# EAGLE board jsbx 11 controls (EAGLE 6.2)
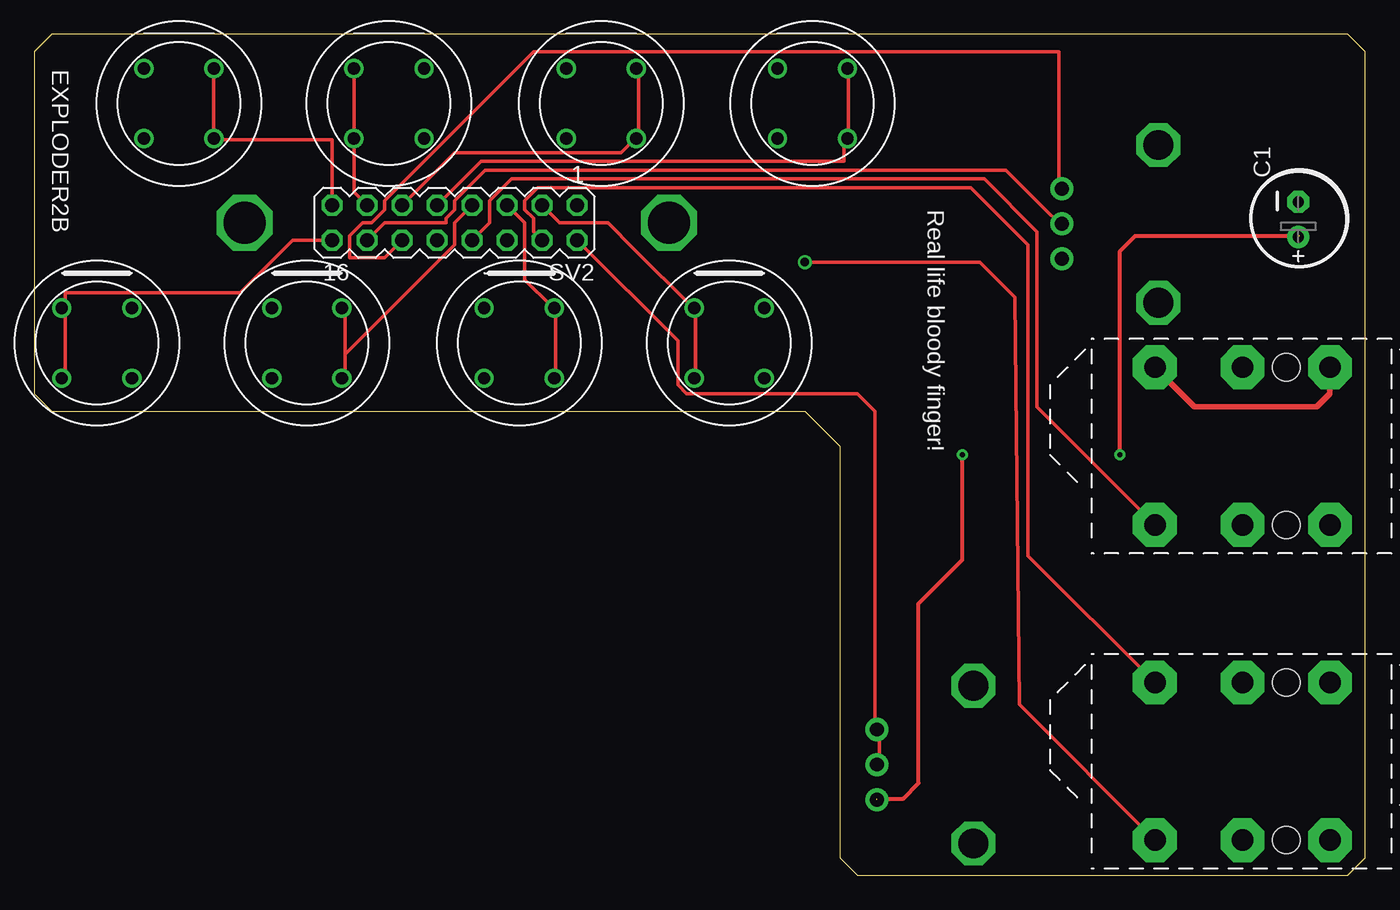
[diagram p0: board, top side]
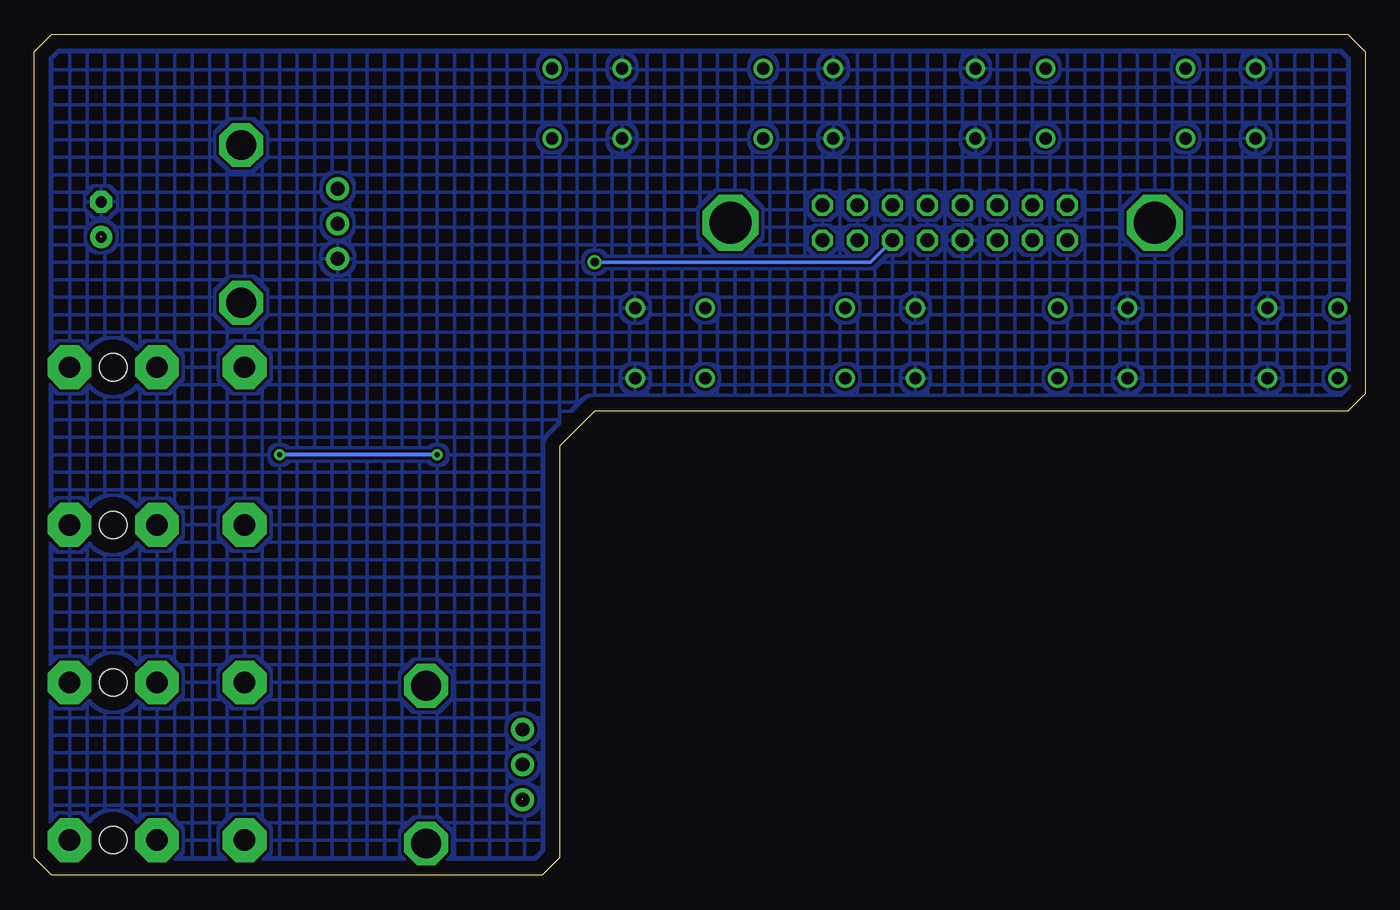
[diagram p1: board, bottom side, seen from below]

Size 96.52 x 60.96 mm. Coordinates in mm from the lower left corner, seen from the top.
Outline: 0,59.69 0,34.92 1.27,33.66 55.88,33.66 58.42,31.11 58.42,1.27 59.69,0 95.25,0 96.52,1.27 96.52,59.69 95.25,60.96 1.27,60.96 0,59.69
Copper layers (1*16): Top 0.035mm / dielectric 1.5mm / Bottom 0.035mm
Design rules: minimum track width 10mil, minimum drill 24mil, track to track 8mil, track to pad 8mil, pad to pad 8mil, via to via 8mil, smd to smd 8mil, copper to edge 40mil, drill to drill 8mil, minimum pad ring 10mil, minimum via ring 8mil, stop-mask expansion 4mil, vias tented up to drill 0mil, thermal gap 10mil

## Footprints (pad centres in the part's own frame; a part is rotated, then mirrored left to right if it is on the bottom)
SPDT_TOPHAT = drill 0.889: P$1 -2.54,2.54; P$2 -2.54,-2.54; P$3 2.54,2.54; P$4 2.54,-2.54
E2,5-7 = drill 0.813 pad 1.6: + -1.27,0 | drill 0.813 pad 1.6 octagon: - 1.27,0
MA08-2 = drill 1.016 octagon: 1 -8.89,-1.27; 2 -8.89,1.27; 3 -6.35,-1.27; 4 -6.35,1.27; 5 -3.81,-1.27; 6 -3.81,1.27; 7 -1.27,-1.27; 8 -1.27,1.27; 9 1.27,-1.27; 10 1.27,1.27; 11 3.81,-1.27; 12 3.81,1.27; 13 6.35,-1.27; 14 6.35,1.27; 15 8.89,-1.27; 16 8.89,1.27
POT = drill 1 pad 1.676: P$1 -2.54,-6.985; P$2 0,-6.985; P$3 2.54,-6.985 | drill 2.159 octagon: P$7 -5.715,0; P$8 5.715,0
1/4STEREO = drill 1.549 pad 3.175 octagon: P$1 11.43,0; P$2 11.43,-6.35; P$3 11.43,-12.7; P$4 0,0; P$5 0,-6.35; P$6 0,-12.7 | hole 1.981: 11.43,-3.175; 0,-3.175

## Placement (x,y rotation side)
B1  SPDT_TOPHAT  [SPDT_TOPHAT]  10.48,55.96 0 top
B2  SPDT_TOPHAT  [SPDT_TOPHAT]  25.72,55.96 0 top
B3  SPDT_TOPHAT  [SPDT_TOPHAT]  41.12,55.96 0 top
B4  SPDT_TOPHAT  [SPDT_TOPHAT]  56.44,55.96 0 top
B5  SPDT_TOPHAT  [SPDT_TOPHAT]  4.52,38.58 0 top
B6  SPDT_TOPHAT  [SPDT_TOPHAT]  19.76,38.58 0 top
B7  SPDT_TOPHAT  [SPDT_TOPHAT]  35.16,38.58 0 top
B8  SPDT_TOPHAT  [SPDT_TOPHAT]  50.4,38.58 0 top
C1  [E2,5-7]  91.68,47.55 90 top
SV2  [MA08-2]  30.48,47.31 180 top
U$12  POT  [POT]  81.52,47.23 270 top
U$13  POT  [POT]  68.1,8.02 270 top
U$14  1/4STEREO  [1/4STEREO]  93.98,36.83 270 top
U$15  1/4STEREO  [1/4STEREO]  93.98,13.97 270 top

## Library data of the parts
B1-B8 U$12-U$15 = BLEEP
C1 = rcl
SV2 = con-lstb; OC_FARNELL: unknown; OC_NEWARK: unknown

## Nets
+3V3: SV2.12 U$12.P$1
B1: SV2.14 U$12.P$2
DIST1: SV2.2 U$13.P$1 U$13.P$2
GND: B1.P$1 B1.P$2 B2.P$3 B2.P$4 B3.P$1 B3.P$2 B4.P$1 B4.P$2 B5.P$3 B5.P$4 B6.P$1 B6.P$2 B7.P$1 B7.P$2 B8.P$3 B8.P$4 C1.- SV2.10 U$12.P$3 U$14.P$1 U$15.P$1
GPOT: B4.P$3 B4.P$4 SV2.9
IN_JACK: SV2.8 U$14.P$3
N$4: C1.+ U$13.P$3
N$6: B3.P$3 B3.P$4 SV2.11
N$7: B2.P$1 B2.P$2 SV2.13
N$8: B1.P$3 B1.P$4 SV2.15
N$10: B5.P$1 B5.P$2 SV2.16
N$11: B6.P$3 B6.P$4 SV2.7
N$12: B7.P$3 B7.P$4 SV2.5
N$32: B8.P$1 B8.P$2 SV2.3
OUT: SV2.6 U$15.P$3
OUT_BACK: SV2.4 U$15.P$6
S$1: U$14.P$6

## Tracks (layer width: path | path; a pad name or v marks a point on that pad's centre or on a via)
+3V3
  Top 0.254: SV2.12 25.4,44.77 22.86,44.77 22.86,46.35 23.81,47.31 24.45,47.31 25.4,48.26 25.4,48.89 36.2,59.69 74.3,59.69 74.3,49.85 U$12.P$1
B1
  Top 0.254: SV2.14 25.4,47.31 29.85,47.31 29.85,47.62 30.48,48.26 30.48,48.89 32.7,51.12 70.48,51.12 73.34,48.26 74.3,47.31 U$12.P$2
DIST1
  Top 0.254: SV2.2 46.67,38.73 46.67,35.56 47.31,34.92 59.69,34.92 60.96,33.66 60.96,10.79 U$13.P$1 61.28,10.48 61.28,8.25 U$13.P$2
GND
  pour Bottom (hatched): 0,60.96 96.52,60.96 96.52,0.95 95.25,0 58.42,0 58.42,33.66 0,33.34
GPOT
  Top 0.254: B4.P$3 59.05,58.42 59.05,53.66 B4.P$4 58.74,53.34 58.74,51.75 32.39,51.75 SV2.9
IN_JACK
  Top 0.254: SV2.8 33.02,47.31 33.02,48.89 34.61,50.48 68.9,50.48 72.71,46.67 72.71,33.97 U$14.P$3
N$4  (via drill 0.38)  (2 unrouted)
  Top 0.305: 61.12,5.56 63.02,5.56 64.13,6.67 64.13,19.69 67.31,22.86 v67.31,30.48 | v78.74,30.48 78.74,45.24 79.85,46.35 91.76,46.35
  Bottom 0.305: v67.31,30.48 v78.74,30.48
N$6
  Top 0.254: B3.P$3 43.82,58.42 43.82,53.66 B3.P$4 43.5,53.34 42.55,52.39 30.48,52.39 SV2.11
N$7
  Top 0.254: B2.P$1 23.18,58.42 23.18,53.66 B2.P$2 23.18,53.34 23.18,49.53 SV2.13
N$8
  Top 0.254: 13.02,53.34 B1.P$4 | B1.P$4 B1.P$3 B1.P$4 | 13.02,53.34 B1.P$4 | 13.02,53.34 B1.P$4 | 13.02,53.34 21.59,53.34 SV2.15 | 13.02,53.34 B1.P$4
N$10
  Top 0.254: B5.P$2 2.22,36.2 2.22,40.96 B5.P$1 2.22,41.27 2.22,42.23 14.92,42.23 18.73,46.04 SV2.16
N$11
  Top 0.254: 22.54,37.78 22.54,40.96 B6.P$3 | 22.54,37.78 22.54,36.2 B6.P$4 | SV2.7 30.48,47.31 30.48,45.72 22.54,37.78
N$12
  Top 0.254: B7.P$4 37.78,36.2 37.78,40.96 B7.P$3 37.47,41.27 35.56,43.18 35.56,47.31 SV2.5
N$32
  Top 0.254: B8.P$2 47.94,36.2 47.94,40.96 B8.P$1 47.62,41.27 43.5,45.4 41.59,47.31 38.1,47.31 SV2.3
N$4000  (via drill 3.05)
  other vias: 15.24,47.31
N$5400  (via drill 3.05)
  other vias: 46.04,47.31
OUT  (via drill 0.61)
  Top 0.254: v55.88,44.45 65.09,44.45 68.58,44.45 71.12,41.91 71.44,12.38 U$15.P$3
  Bottom 0.254: SV2.6 35.88,44.45 v55.88,44.45
OUT_BACK
  Top 0.254: SV2.4 36.2,46.67 36.2,47.62 35.56,48.26 35.56,48.89 36.51,49.85 67.94,49.85 72.07,45.72 72.07,23.18 U$15.P$6
S$1
  Top 0.406: U$14.P$6 84.14,33.97 93.03,33.97 93.98,34.92 93.98,37.31

## Text on the board
_tsilk: EXPLODER2B | Real life bloody finger!